# Altium PCB Driver.PcbDoc
Units mil, origin at the board's own origin, x right, y up, seen from the top; angles counter-clockwise.
Board outline 2700 x 1700 mil, 2 copper layers (Top Layer, Bottom Layer); 26 components, 18 nets, 82 pads, 14 vias.
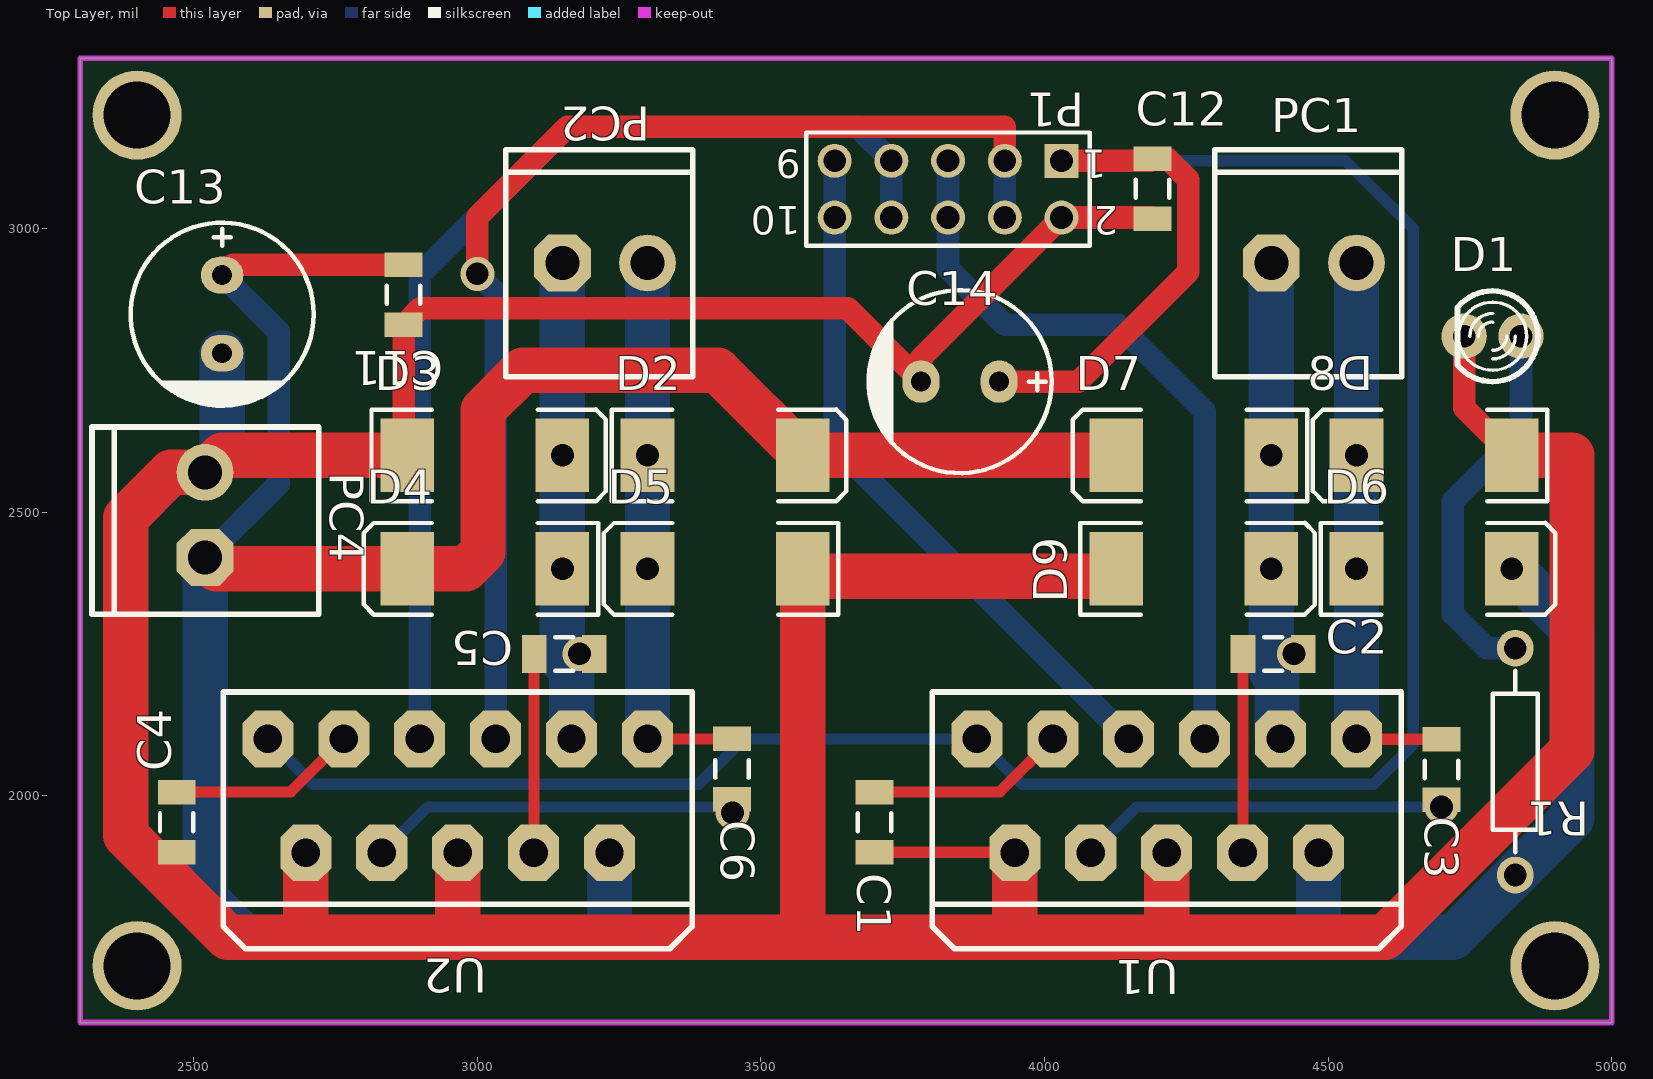
[diagram p0: Top Layer view]
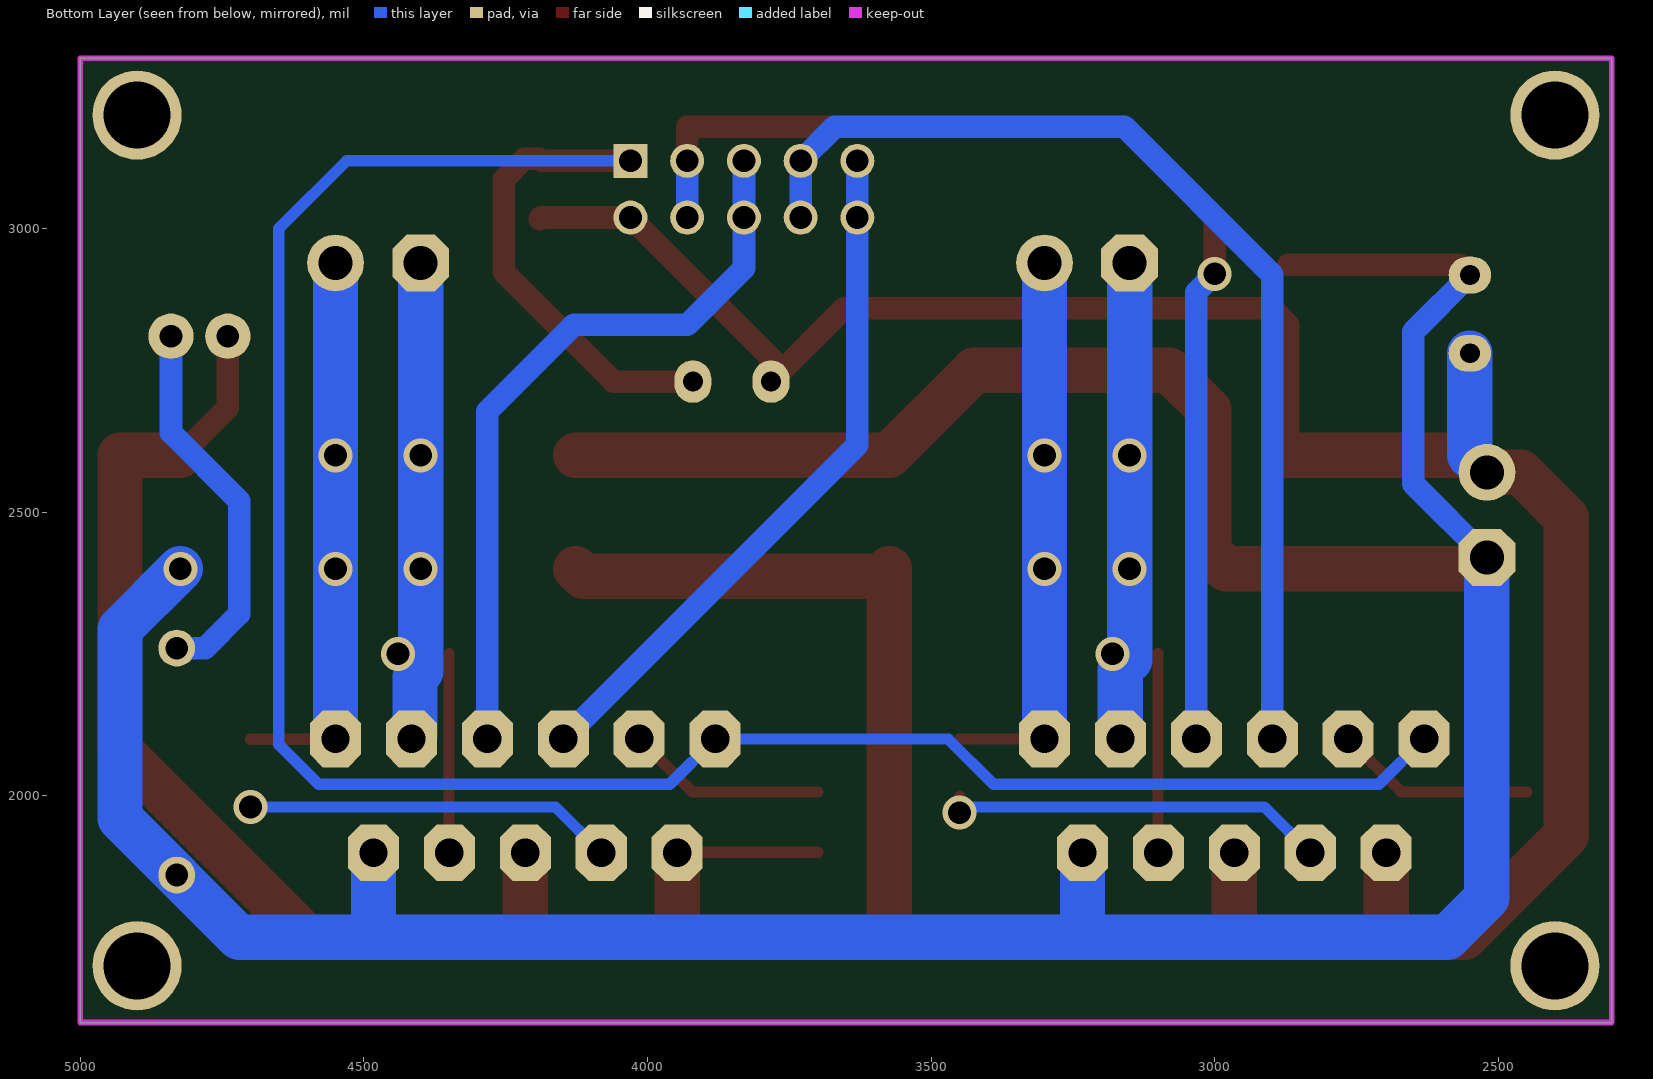
[diagram p1: Bottom Layer view, seen from below]

## Layer stack, top to bottom
Top Solder: solder mask 0.4, Solder Resist, Dk 3.5
Top Layer: signal copper 1.4
Dielectric 1: dielectric 12.6, FR-4, Dk 4.8
Bottom Layer: signal copper 1.4
Bottom Solder: solder mask 0.4, Solder Resist, Dk 3.5

## Board outline
2300,1600 2300,3300 5000,3300 5000,1600

## Design rules (kind name [scope] priority, off if disabled: settings)
Clearance [All] p1: gap=10 ignorepadtopadclearanceinfootprint=FALSE except(0: Arc-Hole Track-Hole SMDPad-Hole THPad-Hole Via-Hole Fill-Hole Poly-Hole Region-Hole Text-Hole)
PolygonConnect [All] p1: connectstyle=Relief reliefconductorwidth=10 reliefentries=4 polygonreliefangle="90 Angle" airgapwidth=10
RoutingVias [All] p1: holewidth=28 width=50 viastyle="Through Hole" minholewidth=28 minwidth=50 maxholewidth=28 maxwidth=50
SolderMaskExpansion [All] p1: expansion=4
Width [All] p1: maxlimit=80 minlimit=20 preferedwidth=40
30 further rules are at their usual default settings.

## Components (designator, comment, footprint, x,y, rotation, side; value= is the part's Value field where it differs from the comment)
C1 "Cap Semi" C1206 3700,1953.15 r90 top value=100pF
C2 "Cap Semi" C1206 4403.15,2250 r0 top value=100pF
C3 "Cap Semi" C1206 4700.02,2046.06 r90 top value=100pF
C4 "Cap Semi" C1206 2470,1953.15 r90 top value=100pF
C5 "Cap Semi" C1206 3153.15,2250 r0 top value=100pF
C6 "Cap Semi" C1206 3449.39,2046.85 r90 top value=100pF
C11 "Cap Semi" C1206 2870,2883.15 r90 top value=100pF
C12 "Cap Semi" C1206 4190,3070 r90 top value=100pF
C13 "1uF" "cap 03" 2550,2848.9 r90 top
C14 "1uF" "cap 03" 3851.1,2730 r0 top
D1 "LED" My_LED3MM 4790,2810 r180 top
D2 "Diode" SMC 3436.81,2600 r0 top
D3 "Diode" SMC 3013.19,2600 r0 top
D4 "Diode" SMC 3013.19,2400 r180 top
D5 "Diode" SMC 3436.81,2400 r180 top
D6 "Diode" SMC 4686.81,2400 r0 top
D7 "Diode" SMC 4263.19,2600 r180 top
D8 "Diode" SMC 4686.81,2600 r180 top
D9 "Diode" SMC 4263.19,2400 r0 top
P1 "Header 5X2" HDR2X5 4030,3119.21 r180 top
PC1 "Power Connector" "My_ Power_Connector" 4250,3139.21 r0 top
PC2 "Power Connector" "My_ Power_Connector" 3000,3139.21 r0 top
PC4 "Power Connector" "My_ Power_Connector" 2320,2270 r90 top
R1 "1k" My_axial-0.4 4830.5,2059.5 r270 top
U1 "L6203" PCBComponent_1 4215.35,2000.51 r180 top
U2 "L6203" PCBComponent_1 2965.35,2000.51 r180 top

## Footprints (in the part's own frame and the unit in brackets; to place one, negate y for a bottom-side part, rotate by r counter-clockwise, add the part's x,y. Pads: shape width x height; smd on the part's side, far side on the other; paste and mask are expansions set on the pad)
C1206 [mm] "Chip Capacitor, Body 3.2x1.6mm, IPC High Density"
  rect 1.1x1.7 smd: 1(-1.35,0) 2(1.35,0)
  silkscreen extent -0.4,-0.75 0.4,0.75, body extent -1.7,-0.9 1.7,0.9, height 1.3
"cap 03" [mil]
  oval 65x75 hole 35: 1(68.9,0) 2(-68.9,0)
  silkscreen extent -161,-161 161,161, body extent -159,-159 157,158, height 473
HDR2X5 [mil] "Connector; Header; 5x2 Position"
  rect 60x60 hole 40: 1(0,0)
  round 60 hole 40: 2(0,100) 3(100,0) 4(100,100) 5(200,0) 6(200,100) 7(300,0) 8(300,100) 9(400,0) 10(400,100)
  silkscreen extent -50,-50 450,150
"My_ Power_Connector" [mil]
  oct 100x100 hole 60: 1(150,-200)
  round 100 hole 60: 2(300,-200)
  silkscreen extent 50,-400 380,0
My_axial-0.4 [mil]
  round 65 hole 40: 1(-200.5,-0.5) 2(199.5,-0.5)
  silkscreen extent -160,-41 160,40
My_LED3MM [mil]
  round 80 hole 40: A(-50,0) K(50,0)
  silkscreen extent -80,-80 62,80
PCBComponent_1 [mil]
  oct 90x100 hole 50: 1(-334.65,-99.49) 2(-267.72,101.3) 3(-200.79,-99.49) 4(-133.86,101.3) 5(-66.93,-99.49) 6(0,101.3) 7(66.93,-99.49) 8(133.86,101.3) 9(200.79,-99.49) 10(267.72,101.3) 11(334.65,-99.49)
  silkscreen extent -413,-182 413,271
SMC [mm] "DO-214-AB/SMC; 2 C-Bend Leads; Body 7.9 x 5.9 mm, inc. leads (LxW)"
  rect 2.4x3.3 smd: 1(-3.475,0) 2(3.475,0)
  silkscreen extent -5.07,-2.05 5.43,2.05

## Part data
C1 C2 C3 C4 C5 C6 C11 C12: "Capacitor (Semiconductor SIM Model)", LatestRevisionDate=29-May-2009, LatestRevisionNote="IPC-7351 Footprint Added.", PackageDescription="Chip Capacitor", PackageReference=C1206, Published=8-Jun-2000, Publisher="Altium Limited"
C13 C14: library part Cap-Polar, "Polar Capacitor", Voltage=16V, Adding Date=1387/12/20, Designer="Saeid Jorablo", Organazation=ControTec
D1: "Typical INFRARED GaAs LED", LatestRevisionDate=08-Jul-2005, LatestRevisionNote="Mech Layer 1 removed.", Published=8-Jun-2000, Publisher="Altium Limited"
D2 D3 D4 D5 D6 D7 D8 D9: "Default Diode", Code_JEDEC=DO-214-AB, LatestRevisionDate=17-Jul-2002, LatestRevisionNote="Re-released for DXP Platform.", PackageDescription="DO-214-AB/SMC; 2 C-Bend Leads; Body 7.9 x 5.9 mm, inc. leads (LxW)", PackageReference=SMC, PackageVersion=Sep-1996, Published=8-Jun-2000, Publisher="Altium Limited"
P1: "Header, 5-Pin, Dual row", LatestRevisionDate=17-Jul-2002, LatestRevisionNote="Re-released for DXP Platform.", Publisher="Altium Limited"
PC1 PC2 PC4: "white Power Connector"
R1: library part Res, "resistor 1/4 wat"

## Free pads (board coordinates)
  round 157.48 hole 118.11: 11(2400,1700) 13(4900,1700) 14(4900,3200) 15(2400,3200)

## Via types
v1: diameter 60, hole 40, Top Layer to Bottom Layer, 14 vias

## Nets (pads, with @x,y where several pads share a name; then routed paths per layer and width w, separated by ;. In a path a pad name is that pad's centre, name@x,y a point inside that pad or via, vN(x,y) a via of type N, cw(c..) or ccw(c..) an arc to the next point about the centre after c; other vN are vias at no path point)
GND: C1.1 C4.1 C11.1 C12.1 C13.2 C14.2 D1.K D3.1 D5.1 D8.1 D9.1 P1.2 PC4.2 U1.6 U1.10 U2.6 U2.10 | length 8800
  Top Layer w20: C1.1 3946.85,1900 U1.10
  Top Layer w40: D3.1 2870,2606.38 C11.1 2899.21,2859.21 3652.99,2859.21 C14.2 3782.2,2771.42 P1.2 4187.64,3019.21 C12.1 ; 3800,2386.54 3806.85,2393.39 ; D1.K 4740,2683.62 D8.1
  Top Layer w80: U2.10 2697.64,1757.64 2690,1750 ; D3.1 2550,2600 PC4.2 2460,2570 2380,2490 2380,1930 2560,1750 2690,1750 ; U2.6 2965.35,1754.65 2970,1750 ; U1.10 3947.64,1757.64 3940,1750 ; D9.1 4112.91,2386.54 3800,2386.54 3587.09,2386.54 D5.1 3573.62,1753.62 3570,1750 ; U1.6 4215.35,1754.65 4220,1750 ; D8.1 4930,2600 4930,2080 4600,1750 4220,1750 ; 2690,1750 2970,1750 ; 2970,1750 3570,1750 ; 3570,1750 3940,1750 ; 3940,1750 4220,1750
  Bottom Layer w80: PC4.2 2550,2600 C13.2
m1-D: P1.9 P1.10 U1.7 | length 1234
  Bottom Layer w40: P1.9 3630,2618.43 U1.7
m1-P: P1.5 P1.6 U1.5 | length 1323.7
  Bottom Layer w40: P1.5 P1.6 3830,2930 3930,2830 4130,2830 4282.28,2677.72 U1.5
m2-D: P1.7 P1.8 U2.7 | length 1882.9
  Bottom Layer w40: U2.7 2898.43,2918.43 3159.21,3179.21 3670,3179.21 P1.7 P1.8
m2-P: P1.3 P1.4 U2.5 | length 2089.3
  Top Layer w40: v1(3000,2920) 3000,3020 3159.21,3179.21 3930,3179.21 P1.3
  Bottom Layer w40: v1(3000,2920) 3032.28,2887.72 U2.5 ; P1.4 P1.3
NetC1_2: C1.2 U1.9 | length 353.4
  Top Layer w20: C1.2 3920.87,2006.3 U1.9
NetC2_1: C2.1 U1.4 | length 351.1
  Top Layer w20: U1.4 4350,1900 C2.1
NetC2_2: C2.2 D7.1 D9.2 PC1.1 U1.3 | length 845.9
  Bottom Layer w80: PC1.1 v1(4400,2600) v1(4400,2400) 4400,2219.21 4410,2209.21 4410,2106.14 U1.3
  other v1: 4440,2250
NetC3_1: C3.1 U1.8 | length 652
  Bottom Layer w20: U1.8 4162.28,1980 v1(4700,1980)
NetC3_2: C3.2 D6.1 D8.2 PC1.2 U1.1 | length 989.6
  Top Layer w20: U1.1 4550.79,2099.21 C3.2
  Bottom Layer w80: U1.1 v1(4550,2400) v1(4550,2600) PC1.2
NetC4_2: C4.2 U2.9 | length 353.4
  Top Layer w20: C4.2@2450,2006.3 2670.87,2006.3 U2.9
NetC5_1: C5.1 U2.4 | length 351.1
  Top Layer w20: U2.4 3100,1900 C5.1
NetC5_2: C5.2 D3.2 D4.1 PC2.1 U2.3 | length 845.9
  Bottom Layer w80: PC2.1 3150,2239.21 3166.14,2223.07 U2.3
  other v1: 3180,2250 3150,2400 3150,2600
NetC6_1: C6.1 U2.8 | length 661.6
  Top Layer w20: C6.1 C6.1@3449.39,1999.21
  Bottom Layer w20: U2.8 2912.28,1980 3440,1980 v1(3450,1970)
NetC6_2: C6.2 D2.1 D5.2 PC2.2 U2.1 | length 988.6
  Top Layer w20: U2.1 C6.2
  Bottom Layer w80: U2.1 v1(3300,2400) v1(3300,2600) PC2.2
NetD1_A: D1.A R1.1 | length 674.6
  Bottom Layer w40: R1.1 4780,2260 4720,2320 4720,2520 4840,2640 D1.A
VCC: C12.2 C14.1 P1.1 U1.11 U2.11 | length 4544
  Top Layer w40: C14.1 4060,2730 4253.46,2923.46 4253.46,3086.54 4216.85,3123.15 C12.2 4186.06,3119.21 P1.1
  Bottom Layer w20: U2.11 2710.71,2020 3390,2020 3470,2100 U1.11 3960.71,2020 4580,2020 4650,2090 4650,3000 4530.79,3119.21 P1.1
Vs: C11.2 C13.1 D2.2 D4.2 D6.2 D7.2 PC4.1 R1.2 U1.2 U2.2 | length 6803.2
  Top Layer w40: C13.1 2568.5,2936.3 C11.2
  Top Layer w80: PC4.1 2540,2400 D4.2 2980,2400 3010,2430 3010,2680 3080,2750 3423.62,2750 D2.2 D7.2
  Bottom Layer w40: PC4.1 2650,2550 2650,2817.8 C13.1
  Bottom Layer w80: PC4.1 2520,1820 2590,1750 3240,1750 ; U2.2 3233.07,1756.93 3240,1750 ; U1.2 4483.07,1756.93 4490,1750 ; v1(4823.62,2400) 4930,2293.62 4930,1960 4720,1750 4490,1750 ; 3240,1750 4490,1750

## Keep-outs
Keep-Out Layer:
  the board outline again, w10

## Text inside footprints (layer, text, board x,y; h text height)
P1: Top Overlay "10" at 3570,3039.21 h50 r180; Top Overlay "9" at 3570,3139.21 h50 r180; Top Overlay "1" at 4110,3139.21 h50 r180; Top Overlay "2" at 4130,3039.21 h50 r180